# Altium PCB GateDrive.PcbDoc (part 2 of 4)
Units mm, origin at the board's own origin, x right, y up, seen from the top; angles counter-clockwise.
Board outline 204.3 x 129.8 mm, 4 copper layers (Top Layer, Internal Plane 1, Internal Plane 2, Bottom Layer), stack 0.778 mm thick; 412 components, 227 nets, 1153 pads, 570 vias.
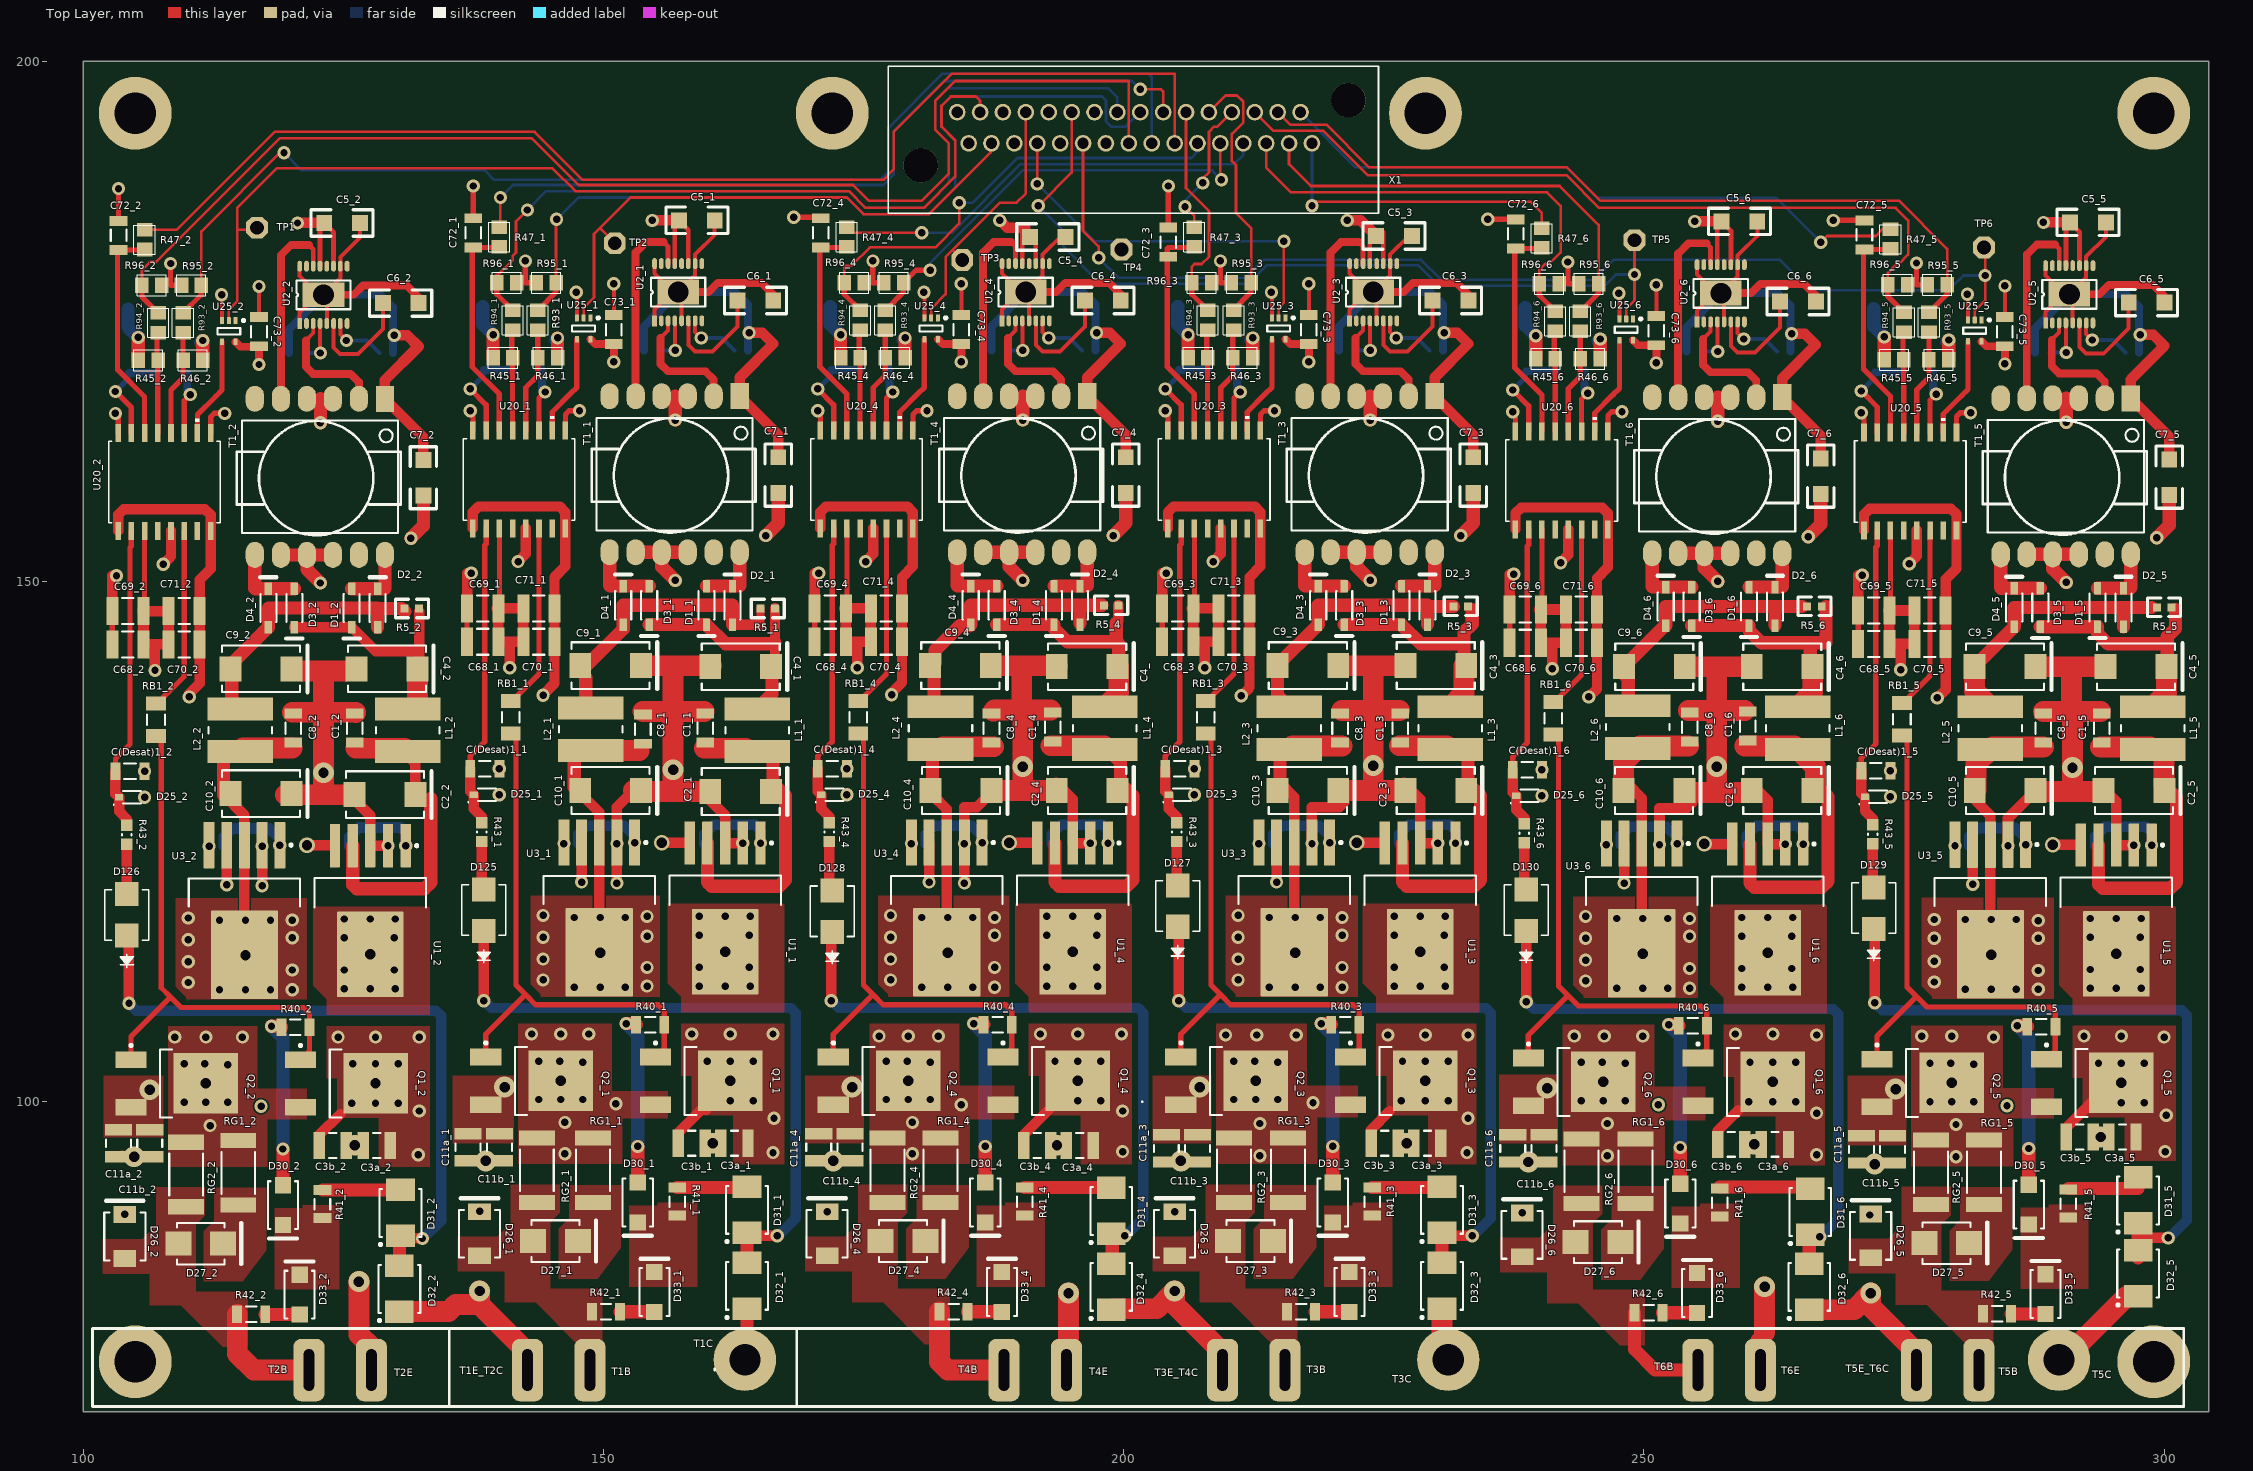
[diagram p0: Top Layer view]

## Part data (continued)
U25_1 U25_2 U25_3 U25_4 U25_5 U25_6: library part CMP-0859-00371-3, "Single Power Supply BUFFER Logic Level Shifter (no enable), DCK0005A, LARGE T&R", F @ Nom Voltage(Max)(Mhz)=50, Generic Part Number=SN74LV1T34, ICC @ Nom Voltage(Max)(mA)=0.01, Manufacturer="Texas Instruments", Operating Temperature Range(C)="-40 to 125", Rating=Catalog, tpd @ Nom Voltage(Max)(ns)=14.5,9.5,8.0,6.5, Voltage(Nom)(V)=1.8,2.5,3.3,5.5, 3-State Output=Yes, Bits(#)=1, DatasheetVersion=SCLS743A, Input Type=TTL, Logic=True, Output Drive (IOL/IOH)(Max)(mA)=8/-8, Output Type=CMOS, PackageReference=DCK0005A, PartId=1, Schmitt Trigger=No, Special Features="1.8V to 3.3V Up Translation,3.3V to 1.8V Down Translation,5V Input Tolerant", Sub-Family="Non-Inverting Buffer/Driver", Technology Family=LV1T, VCC(Max)(V)=5.5, VCC(Min)(V)=1.6

## Free pads (board coordinates)
  round 7 hole 4: 4(105,75) 4(105,195) 5(172,195) 5(229,195) 5(299,75) 5(299,195)

## Via types
v1: diameter 1.27, hole 0.711, Top Layer to Bottom Layer, 510 vias
v2: diameter 2, hole 1, Top Layer to Bottom Layer, 54 vias
v3: diameter 1.5, hole 1, Top Layer to Bottom Layer, 6 vias

## Nets (pads, with @x,y where several pads share a name; then routed paths per layer and width w, separated by ;. In a path a pad name is that pad's centre, name@x,y a point inside that pad or via, vN(x,y) a via of type N, cw(c..) or ccw(c..) an arc to the next point about the centre after c; other vN are vias at no path point)
+5V: C5_1.1 C5_2.1 C5_3.1 C5_4.1 C5_5.1 C5_6.1 C73_1.1 C73_2.1 C73_3.1 C73_4.1 C73_5.1 C73_6.1 R44_1.1 R44_2.1 R44_3.1 R44_4.1 R44_5.1 R44_6.1 R45_1.2 R45_2.2 R45_3.2 R45_4.2 R45_5.2 R45_6.2 R46_1.2 R46_2.2 R46_3.2 R46_4.2 R46_5.2 R46_6.2 T1_1.3 T1_1.4 T1_2.3 T1_2.4 T1_3.3 T1_3.4 T1_4.3 T1_4.4 T1_5.3 T1_5.4 T1_6.3 T1_6.4 U2_1.11 U2_1.13 U2_2.11 U2_2.13 U2_3.11 U2_3.13 U2_4.11 U2_4.13 U2_5.11 U2_5.13 U2_6.11 U2_6.13 U25_1.5 U25_2.5 U25_3.5 U25_4.5 U25_5.5 U25_6.5 X1.1 X1.5 X1.9 X1.13 | length 150.6
  Top Layer w0.457: U2_2.13@122.764,180.294 122.764,184.043 C5_2.1@123.171,184.45 124.064,183.557 U2_2.11@124.064,180.294 ; U2_1.13@156.864,180.544 156.864,184.293 C5_1.1@157.271,184.7 158.164,183.807 U2_1.11@158.164,180.544 ; U2_4.13@190.264,180.544 190.264,184.293 190.557,184 ; U2_4.11@191.564,180.544 C5_4.1@191.564,183.1 ; U2_3.13@223.664,180.544 223.664,184.293 224.357,183.6 224.757,183.6 224.829,183.671 224.964,183.536 U2_3.11@224.964,180.544 ; U2_6.13@257.064,180.444 257.064,184.193 C5_6.1@257.471,184.6 258.364,183.707 U2_6.11@258.364,180.444 ; U2_5.13@290.564,180.344 290.564,184.093 C5_5.1@290.971,184.5 291.864,183.607 U2_5.11@291.864,180.344
  Top Layer w0.762: U25_2.5@114.65,173.025 115.125,172.55 116.9,172.55 v1(116.9,170.85) ; U25_1.5@148.75,173.275 149.225,172.8 C73_1.1@151,172.8 v1(151,171.1) ; U25_4.5@182.15,173.275 182.625,172.8 C73_4.1@184.4,172.8 v1(184.4,171.1) ; U25_3.5@215.55,173.275 216.025,172.8 C73_3.1@217.8,172.8 v1(217.8,171.1) ; U25_6.5@248.95,173.175 249.425,172.7 C73_6.1@251.2,172.7 v1(251.2,171) ; U25_5.5@282.45,173.075 282.925,172.6 C73_5.1@284.7,172.6 v1(284.7,170.9)
  Top Layer w1.016: v1(120.6,184.45) C5_2.1@123.171,184.45 ; v1(154.7,184.7) C5_1.1@157.271,184.7 ; v1(188.1,184.7) 188.8,184 190.557,184 ; v1(221.5,184.7) 222.771,184.7 C5_3.1@224.271,183.2 ; v1(254.9,184.6) C5_6.1@257.471,184.6 ; v1(288.4,184.5) C5_5.1@290.971,184.5
  Top Layer w1.27: R45_2.2@105.3,171.25 v1(105.3,173.45) ; R46_2.2@111.5,171.25 v1(111.5,173.15) ; v1(122.8,165.25) 122.8,167.55 ; R45_1.2@139.4,171.5 v1(139.4,173.7) ; R46_1.2@145.6,171.5 v1(145.6,173.4) ; v1(156.9,165.5) 156.9,167.8 ; R45_4.2@172.8,171.5 v1(172.8,173.7) ; R46_4.2@179,171.5 v1(179,173.4) ; v1(190.3,165.5) 190.3,167.8 ; R45_3.2@206.2,171.5 v1(206.2,173.7) ; R46_3.2@212.4,171.5 v1(212.4,173.4) ; v1(223.7,165.5) 223.7,167.8 ; R45_6.2@239.6,171.4 v1(239.6,173.6) ; R46_6.2@245.8,171.4 v1(245.8,173.3) ; v1(257.1,165.4) 257.1,167.7 ; R45_5.2@273.1,171.3 v1(273.1,173.5) ; R46_5.2@279.3,171.3 v1(279.3,173.2) ; v1(290.6,165.3) 290.6,167.6
  Bottom Layer w1.27: R44_2.1@104.3,176.15 104.3,174.45 v1(105.3,173.45) ; v1@111.3,172.95 v1(111.5,173.15) ; R44_1.1@138.4,176.4 138.4,174.7 v1(139.4,173.7) ; v1@145.4,173.2 v1(145.6,173.4) ; R44_4.1@171.8,176.4 171.8,174.7 v1(172.8,173.7) ; v1@178.8,173.2 v1(179,173.4) ; R44_3.1@205.2,176.4 205.2,174.7 v1(206.2,173.7) ; v1@212.2,173.2 v1(212.4,173.4) ; R44_6.1@238.6,176.3 238.6,174.6 v1(239.6,173.6) ; v1@245.6,173.1 v1(245.8,173.3) ; R44_5.1@272.1,176.2 272.1,174.5 v1(273.1,173.5) ; v1@279.1,173 v1(279.3,173.2)
+15VT1: C3a_1.2 C3b_1.2 C68_1.2 C69_1.2 D26_1.2 Q1_1.4 R1_1.2 U1_1.5 U20_1.5 | length 20.8
  Top Layer w0.508: C68_1.2@136.9,144.2 C69_1.2@136.9,147.4 ; v1@136.9,150.8 v1(137.3,150.8)
  Top Layer w1: C69_1.2@136.9,147.4 v1@136.9,150.8 ; D26_1.2@138.1,89.41 v1(138.1,89.458) ; v1(141.8,151.9) 142.54,152.64 U20_1.5@142.54,155.102 ; v3(155.61,124.89) 158.26,124.89 U1_1.5@158.3,124.85 ; C3b_1.2@157.2,96 157.2,97 159.4,99.2 Q1_1.4@159.9,99.2
  Bottom Layer w0.508: v3@155.61,124.71 v3(155.61,124.89) 155.7,124.8 R1_1.2@158.303,124.8
  other v1: 166.3,95.1 166.4,98.4 162.2,100.1 164.4,100.1 160,103.9 162.2,103.9 164.4,103.9 158.5,106.5 162.2,106.5 166.3,106.5
  other v2: 162.2,102

## Text inside footprints (layer, text, board x,y; h text height)
D128: Mechanical 7 "0.181in/4.597mm" at 177.664,115.919 h0.64 r90; Mechanical 7 "0.156in/3.962mm" at 172.317,126.187 h0.64 r90; Mechanical 7 "0.087in/2.21mm" at 172.317,124.142 h0.64 r90; Mechanical 7 "0.063in/1.6mm" at 168.241,114.242 h0.64 r90; Mechanical 7 "0.22in/5.588mm" at 165.701,116.077 h0.64 r90; Mechanical 7 "Alt 2 Padstyle: OX90Y60D30P" at 185.195,109.727 h1.27 r90; Mechanical 7 "Alt 1 Padstyle: OX60Y90D30P" at 183.29,109.727 h1.27 r90; Mechanical 7 "Default Padstyle: RX91Y89D0T" at 181.385,109.41 h1.27 r90
D129: Mechanical 7 "0.181in/4.597mm" at 277.764,116.219 h0.64 r90; Mechanical 7 "0.156in/3.962mm" at 272.417,126.487 h0.64 r90; Mechanical 7 "0.087in/2.21mm" at 272.417,124.442 h0.64 r90; Mechanical 7 "0.063in/1.6mm" at 268.341,114.542 h0.64 r90; Mechanical 7 "0.22in/5.588mm" at 265.801,116.378 h0.64 r90; Mechanical 7 "Alt 2 Padstyle: OX90Y60D30P" at 285.295,110.028 h1.27 r90; Mechanical 7 "Alt 1 Padstyle: OX60Y90D30P" at 283.39,110.028 h1.27 r90; Mechanical 7 "Default Padstyle: RX91Y89D0T" at 281.485,109.71 h1.27 r90
D130: Mechanical 7 "0.181in/4.597mm" at 244.364,116.019 h0.64 r90; Mechanical 7 "0.156in/3.962mm" at 239.018,126.287 h0.64 r90; Mechanical 7 "0.087in/2.21mm" at 239.018,124.242 h0.64 r90; Mechanical 7 "0.063in/1.6mm" at 234.941,114.342 h0.64 r90; Mechanical 7 "0.22in/5.588mm" at 232.401,116.177 h0.64 r90; Mechanical 7 "Alt 2 Padstyle: OX90Y60D30P" at 251.895,109.827 h1.27 r90; Mechanical 7 "Alt 1 Padstyle: OX60Y90D30P" at 249.99,109.827 h1.27 r90; Mechanical 7 "Default Padstyle: RX91Y89D0T" at 248.085,109.51 h1.27 r90
U20_1: Mechanical 13 "*" at 138.019,156.067 h1.27 r90; Mechanical 7 "0.04in/1.016mm" at 150.185,152.88 h0.64 r90; Mechanical 7 "0.05in/1.27mm" at 138.413,147.927 h0.64 r90; Mechanical 7 "0.412in/10.465mm" at 142.223,166.646 h0.64 r90; Mechanical 7 "0.41in/10.414mm" at 132.355,157.42 h0.64 r90; Mechanical 7 "0.299in/7.595mm" at 134.26,157.42 h0.64 r90; Mechanical 7 "Alt 2 Padstyle: OX90Y60D30P" at 159.837,151.229 h1.27 r90; Mechanical 7 "Alt 1 Padstyle: OX60Y90D30P" at 158.313,151.229 h1.27 r90; Mechanical 7 "Pin One Padstyle: RX68Y21D0T" at 153.741,150.911 h1.27 r90; Mechanical 7 "Default Padstyle: RX68Y21D0T" at 152.217,150.911 h1.27 r90
U20_2: Mechanical 13 "*" at 103.919,155.817 h1.27 r90; Mechanical 7 "0.04in/1.016mm" at 116.085,152.63 h0.64 r90; Mechanical 7 "0.05in/1.27mm" at 104.313,147.677 h0.64 r90; Mechanical 7 "0.412in/10.465mm" at 108.123,166.396 h0.64 r90; Mechanical 7 "0.41in/10.414mm" at 98.255,157.17 h0.64 r90; Mechanical 7 "0.299in/7.595mm" at 100.16,157.17 h0.64 r90; Mechanical 7 "Alt 2 Padstyle: OX90Y60D30P" at 125.737,150.979 h1.27 r90; Mechanical 7 "Alt 1 Padstyle: OX60Y90D30P" at 124.213,150.979 h1.27 r90; Mechanical 7 "Pin One Padstyle: RX68Y21D0T" at 119.641,150.661 h1.27 r90; Mechanical 7 "Default Padstyle: RX68Y21D0T" at 118.117,150.661 h1.27 r90
U20_3: Mechanical 13 "*" at 204.819,156.067 h1.27 r90; Mechanical 7 "0.04in/1.016mm" at 216.985,152.88 h0.64 r90; Mechanical 7 "0.05in/1.27mm" at 205.213,147.927 h0.64 r90; Mechanical 7 "0.412in/10.465mm" at 209.023,166.646 h0.64 r90; Mechanical 7 "0.41in/10.414mm" at 199.155,157.42 h0.64 r90; Mechanical 7 "0.299in/7.595mm" at 201.06,157.42 h0.64 r90; Mechanical 7 "Alt 2 Padstyle: OX90Y60D30P" at 226.637,151.229 h1.27 r90; Mechanical 7 "Alt 1 Padstyle: OX60Y90D30P" at 225.113,151.229 h1.27 r90; Mechanical 7 "Pin One Padstyle: RX68Y21D0T" at 220.541,150.911 h1.27 r90; Mechanical 7 "Default Padstyle: RX68Y21D0T" at 219.017,150.911 h1.27 r90
U20_4: Mechanical 13 "*" at 171.419,156.067 h1.27 r90; Mechanical 7 "0.04in/1.016mm" at 183.585,152.88 h0.64 r90; Mechanical 7 "0.05in/1.27mm" at 171.813,147.927 h0.64 r90; Mechanical 7 "0.412in/10.465mm" at 175.623,166.646 h0.64 r90; Mechanical 7 "0.41in/10.414mm" at 165.755,157.42 h0.64 r90; Mechanical 7 "0.299in/7.595mm" at 167.66,157.42 h0.64 r90; Mechanical 7 "Alt 2 Padstyle: OX90Y60D30P" at 193.237,151.229 h1.27 r90; Mechanical 7 "Alt 1 Padstyle: OX60Y90D30P" at 191.713,151.229 h1.27 r90; Mechanical 7 "Pin One Padstyle: RX68Y21D0T" at 187.141,150.911 h1.27 r90; Mechanical 7 "Default Padstyle: RX68Y21D0T" at 185.617,150.911 h1.27 r90
U20_5: Mechanical 13 "*" at 271.719,155.867 h1.27 r90; Mechanical 7 "0.04in/1.016mm" at 283.885,152.68 h0.64 r90; Mechanical 7 "0.05in/1.27mm" at 272.113,147.727 h0.64 r90; Mechanical 7 "0.412in/10.465mm" at 275.923,166.446 h0.64 r90; Mechanical 7 "0.41in/10.414mm" at 266.055,157.22 h0.64 r90; Mechanical 7 "0.299in/7.595mm" at 267.96,157.22 h0.64 r90; Mechanical 7 "Alt 2 Padstyle: OX90Y60D30P" at 293.537,151.029 h1.27 r90; Mechanical 7 "Alt 1 Padstyle: OX60Y90D30P" at 292.013,151.029 h1.27 r90; Mechanical 7 "Pin One Padstyle: RX68Y21D0T" at 287.441,150.711 h1.27 r90; Mechanical 7 "Default Padstyle: RX68Y21D0T" at 285.917,150.711 h1.27 r90
U20_6: Mechanical 13 "*" at 238.219,155.967 h1.27 r90; Mechanical 7 "0.04in/1.016mm" at 250.385,152.78 h0.64 r90; Mechanical 7 "0.05in/1.27mm" at 238.613,147.827 h0.64 r90; Mechanical 7 "0.412in/10.465mm" at 242.423,166.546 h0.64 r90; Mechanical 7 "0.41in/10.414mm" at 232.555,157.32 h0.64 r90; Mechanical 7 "0.299in/7.595mm" at 234.46,157.32 h0.64 r90; Mechanical 7 "Alt 2 Padstyle: OX90Y60D30P" at 260.037,151.129 h1.27 r90; Mechanical 7 "Alt 1 Padstyle: OX60Y90D30P" at 258.513,151.129 h1.27 r90; Mechanical 7 "Pin One Padstyle: RX68Y21D0T" at 253.941,150.811 h1.27 r90; Mechanical 7 "Default Padstyle: RX68Y21D0T" at 252.417,150.811 h1.27 r90